# Altium PCB sha2017_rev1_0_0.PcbDoc (part 1 of 2)
Units mil, origin at the board's own origin, x right, y up, seen from the top; angles counter-clockwise.
Board outline 3740.16 x 3385.83 mil, 2 copper layers (Top, Bottom), stack 65.748 mil thick; 201 components, 109 nets, 510 pads, 486 vias.
Unrouted connection lines stored in the file: 20.
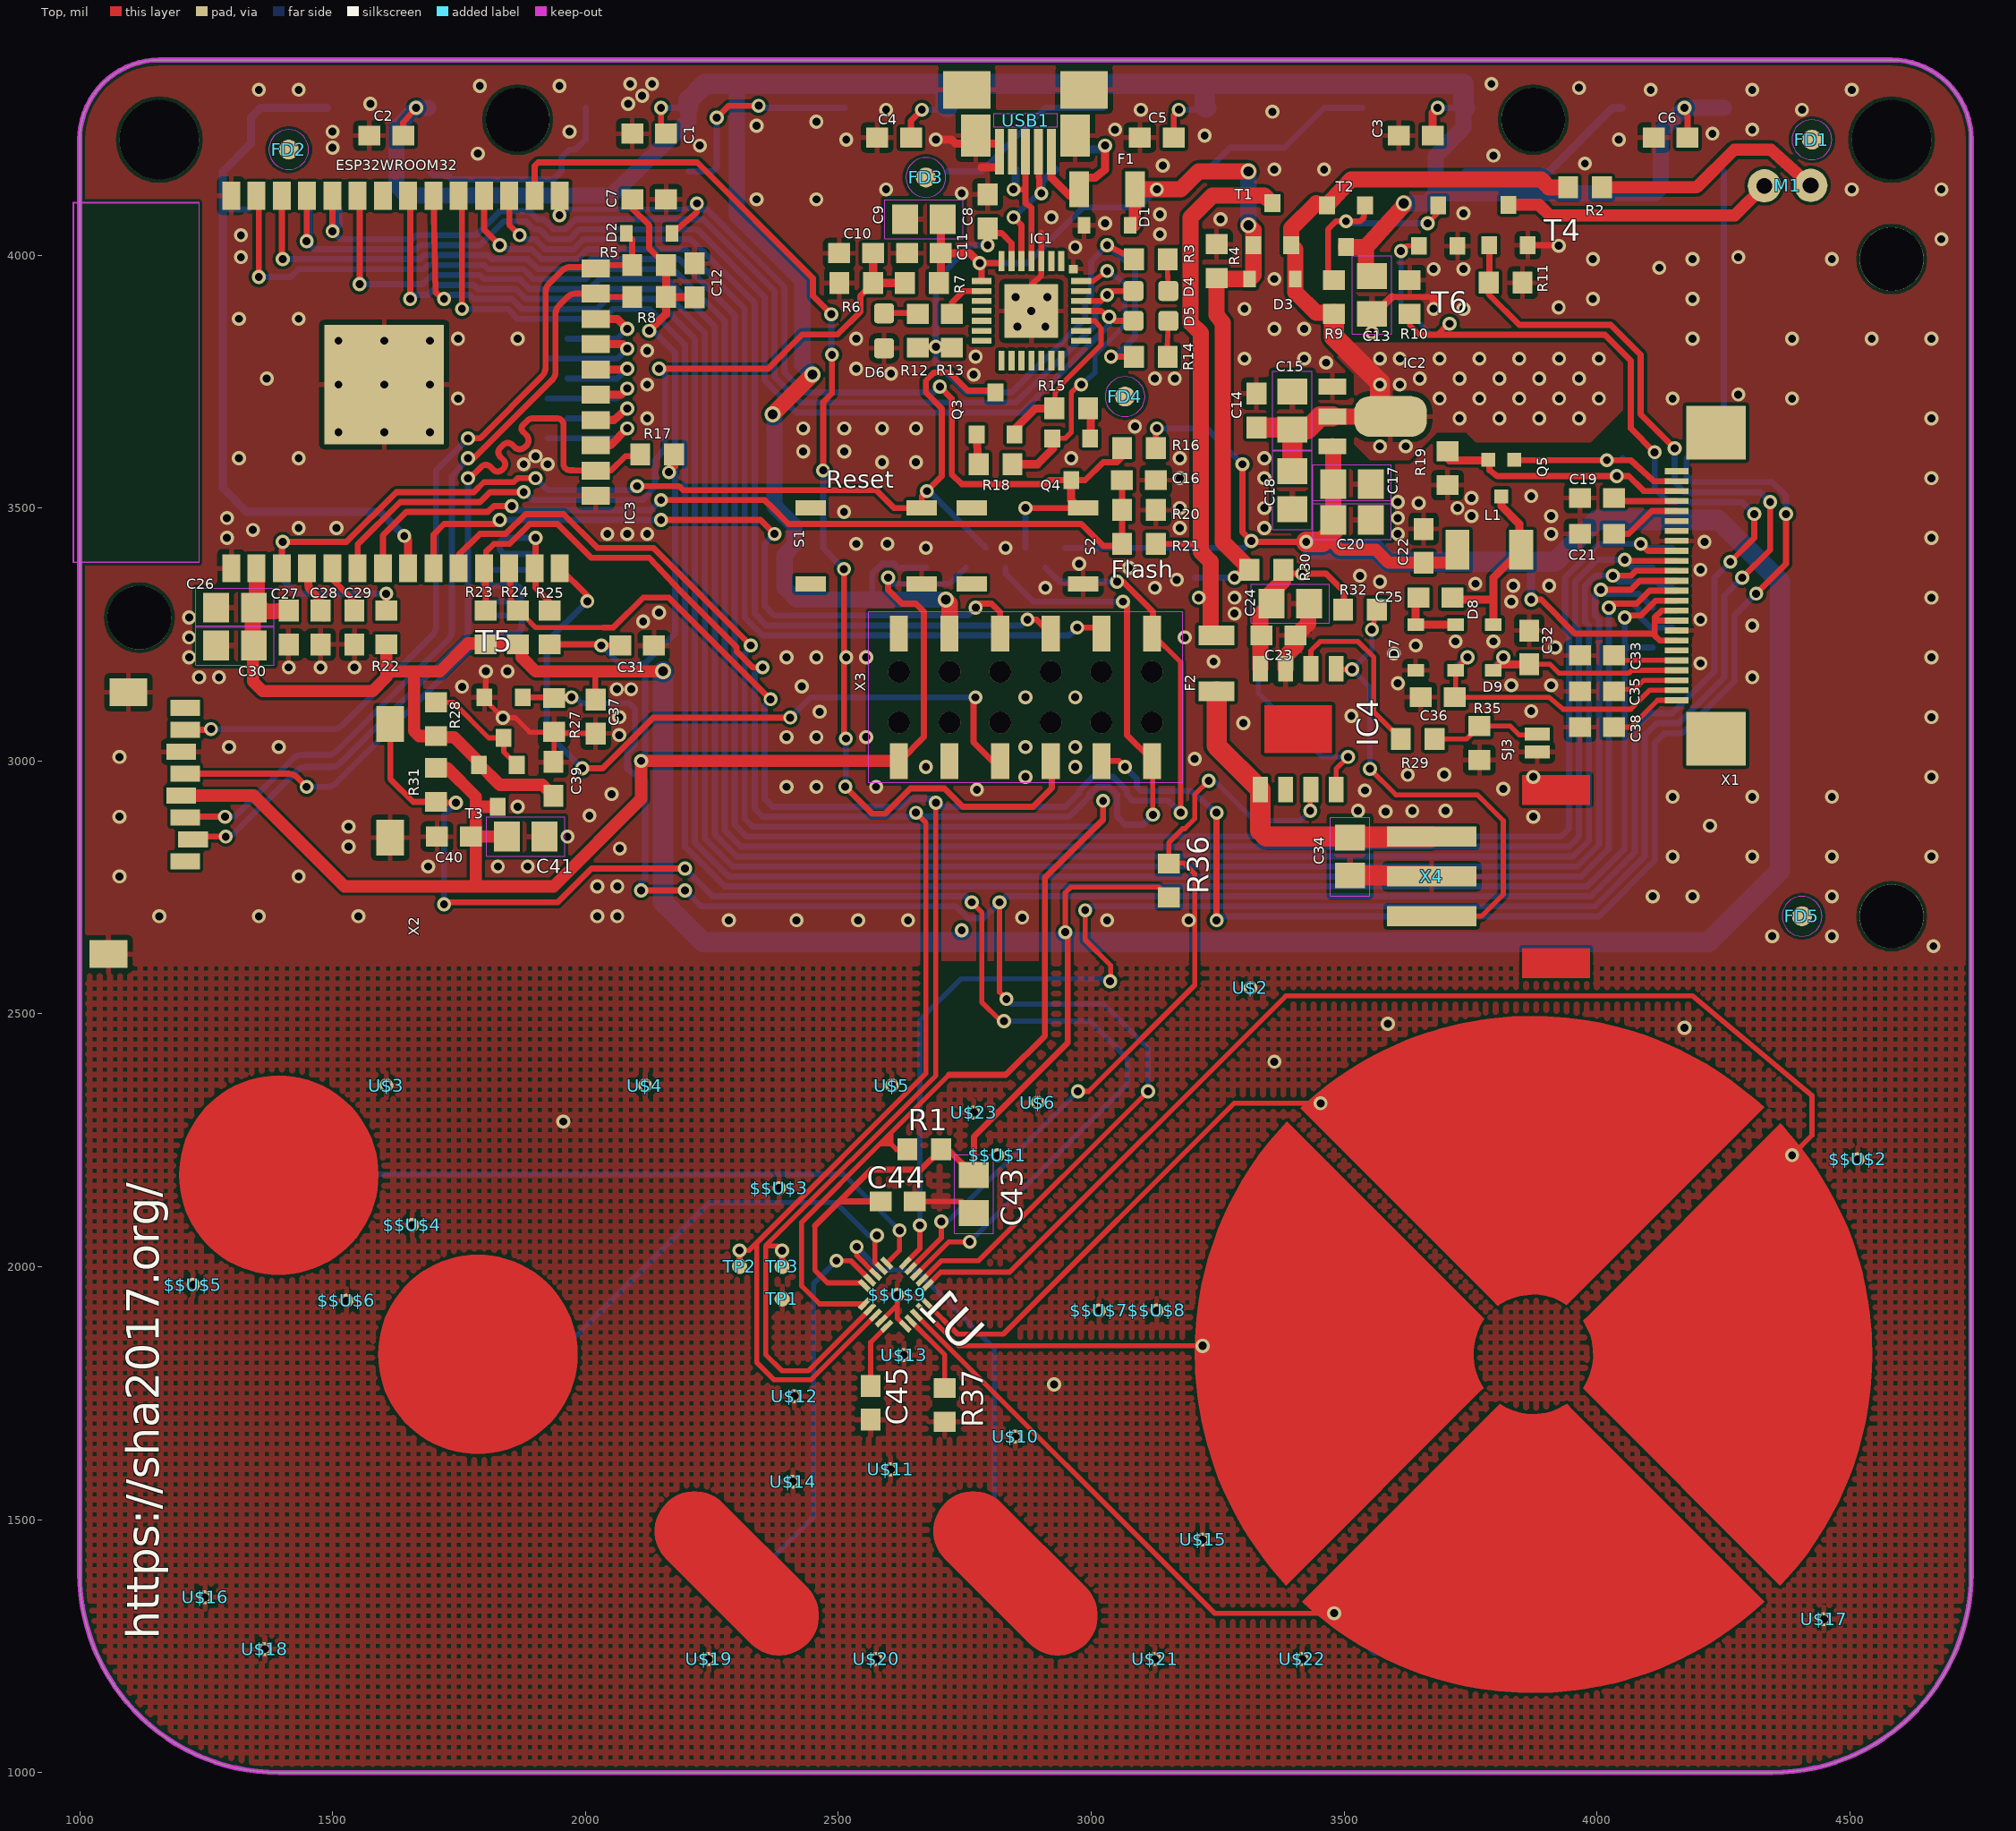
[diagram p0: Top view]
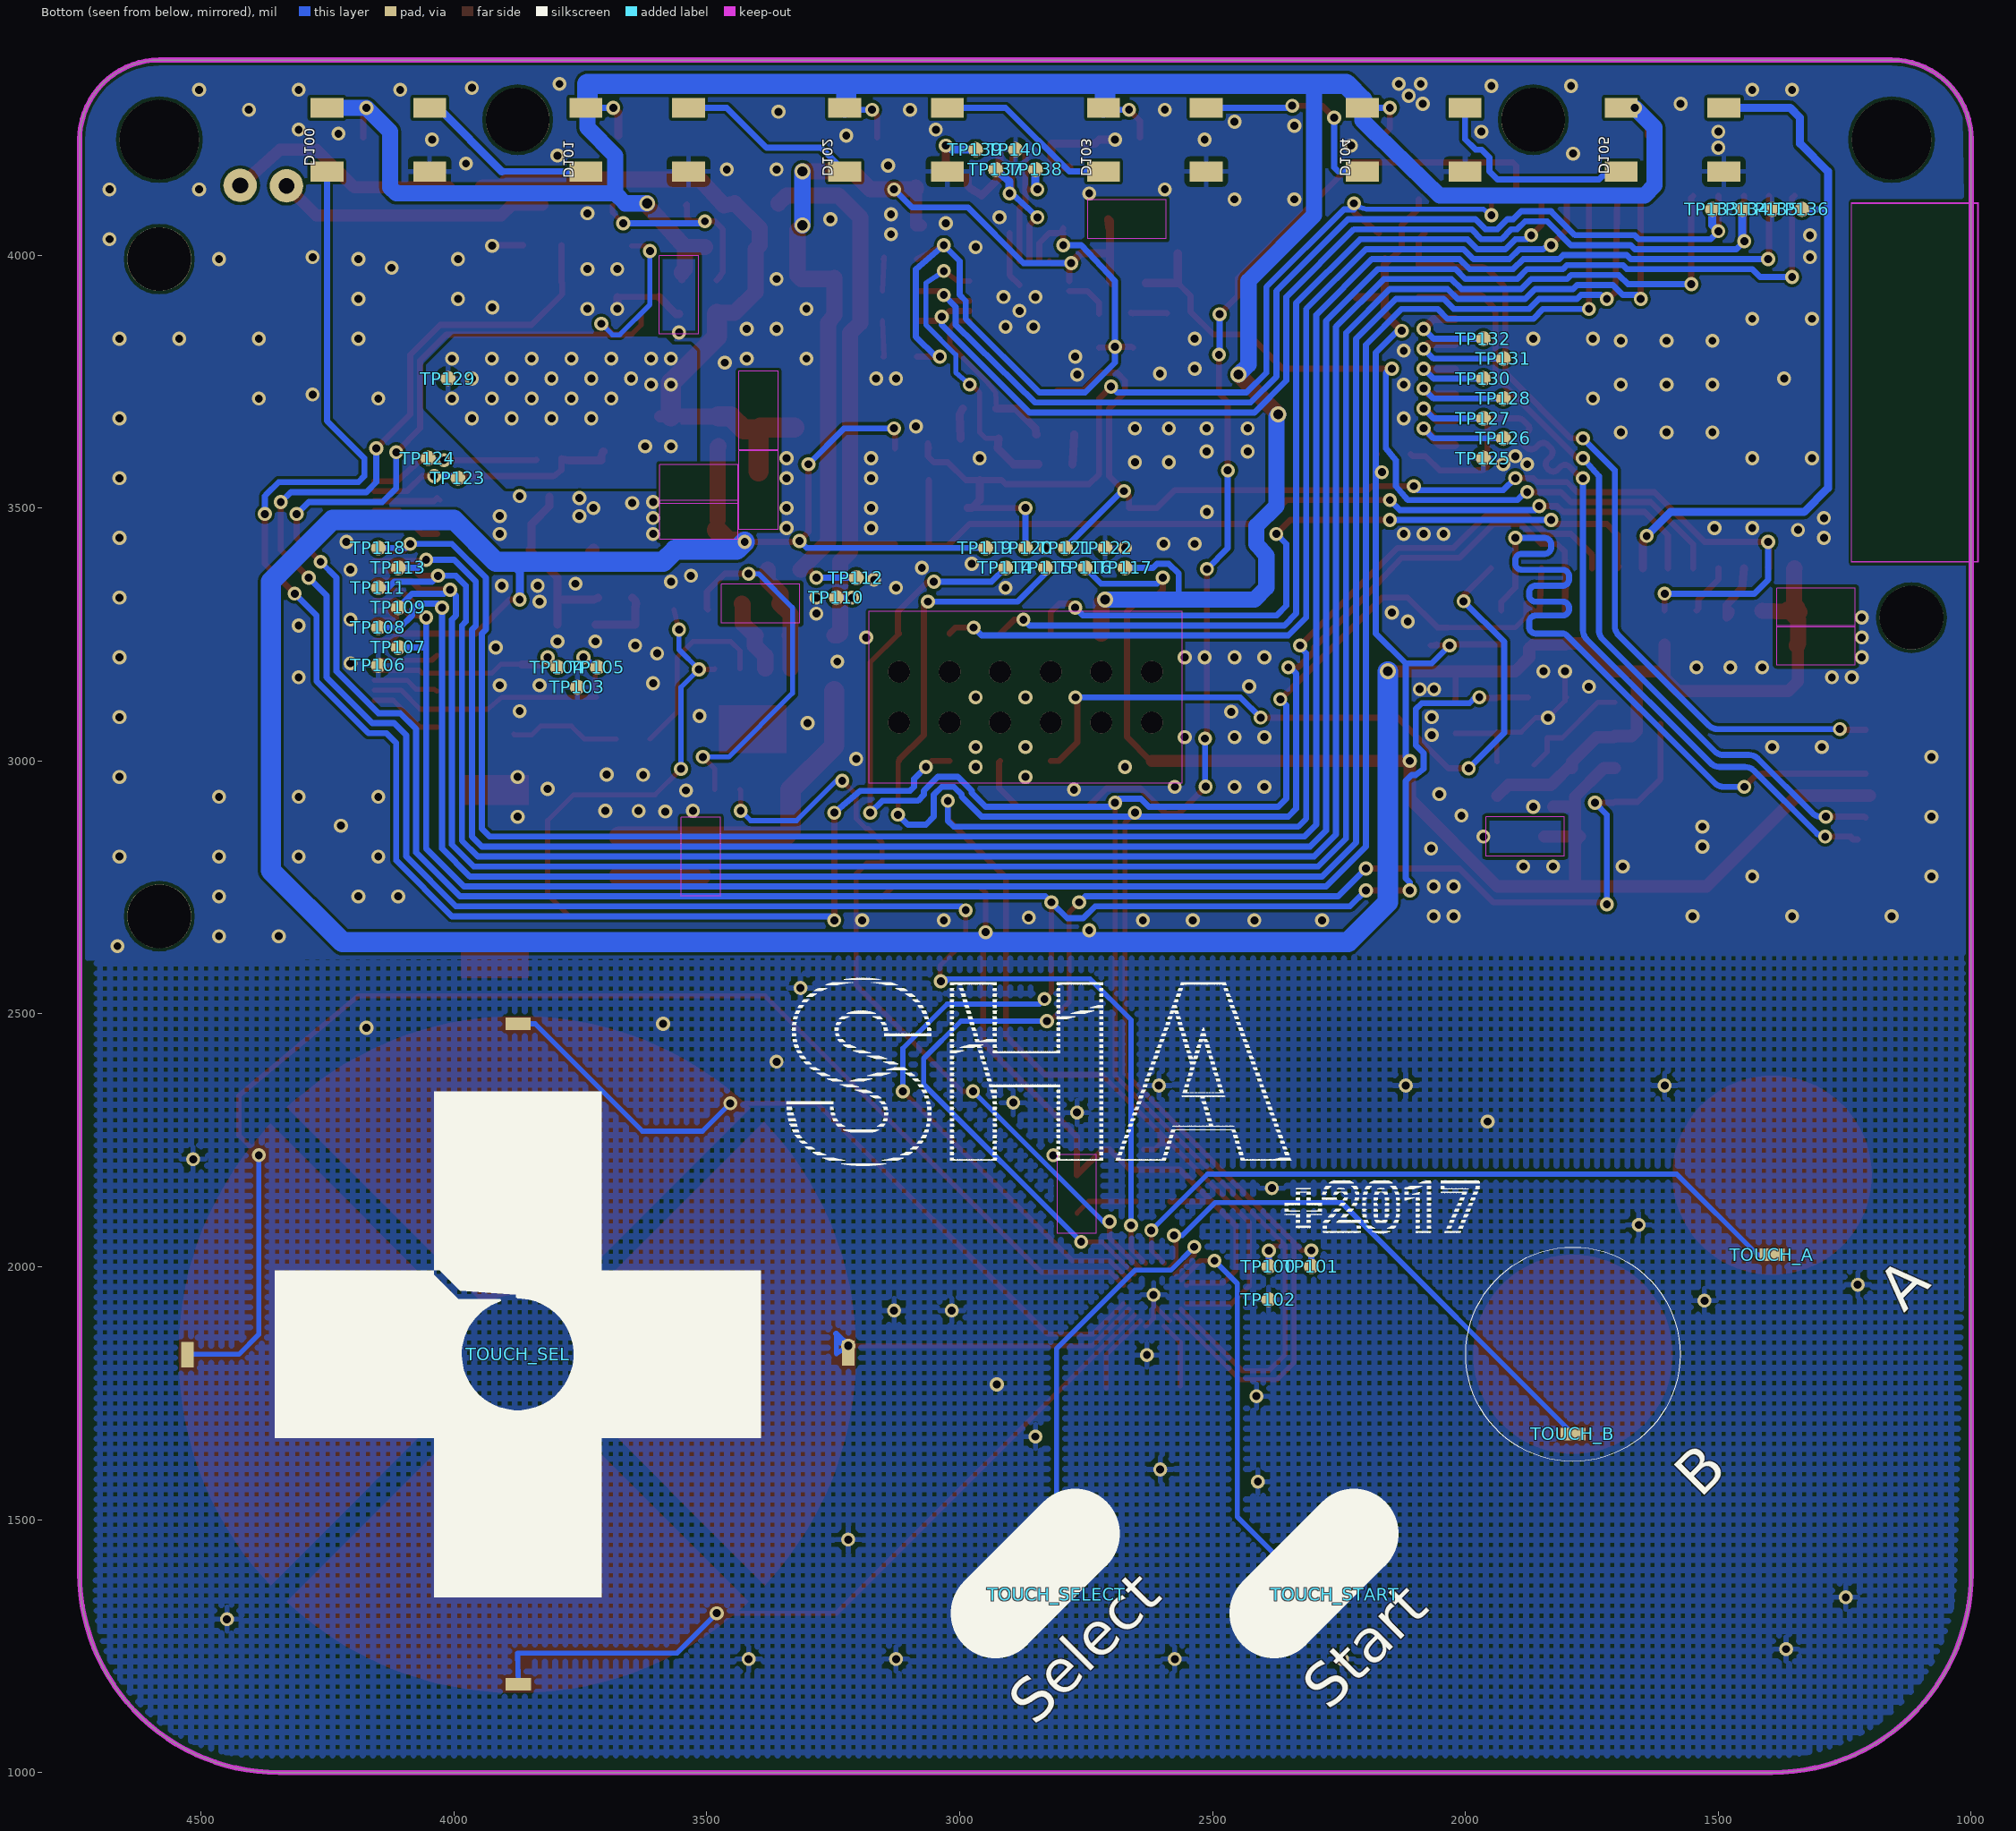
[diagram p1: Bottom view, seen from below]

## Layer stack, top to bottom
Top Solder: solder mask 0.4, Solder Resist, Dk 3.5
Top: signal copper 1.378
Dielectric 1: core 62.9921, FR-4, Dk 4.8
Bottom: signal copper 1.378
Bottom Solder: solder mask 0.4, Solder Resist, Dk 3.5

## Board outline
4582.68,4385.83 1157.48,4385.83 ccw(c1157.48,4228.35) 1000,4228.35 1000,1393.7 ccw(c1393.7,1393.7) 1393.7,1000 4346.46,1000 ccw(c4346.46,1393.7) 4740.16,1393.7 4740.16,4228.35 ccw(c4582.68,4228.35)

## Design rules (kind name [scope] priority, off if disabled: settings)
Clearance [All] p1: gap=6 ignorepadtopadclearanceinfootprint=FALSE except(8: Via-Via)
Clearance "Clearance (Same Net)" [All] p2: gap=0 ignorepadtopadclearanceinfootprint=FALSE
HoleSize HoleSize_1 [All] p1: absolutevalues=TRUE maxlimit=100000 minlimit=12 maxpercent=80.000 minpercent=20.000
HoleSize [All] p2: absolutevalues=TRUE maxlimit=100 minlimit=1 maxpercent=80.000 minpercent=20.000
HoleToHoleClearance mdViaViaSameLayer [All] p1: gap=8 allowstackedmicrovias=TRUE
HoleToHoleClearance [All] p2: gap=10 allowstackedmicrovias=TRUE
PasteMaskExpansion mlMinCreamFrame [All] p1: expansion=0
PasteMaskExpansion [All] p2: expansion=0
PolygonConnect ThermalVias [IsVia] p1: connectstyle=Direct reliefconductorwidth=10 reliefentries=4 polygonreliefangle="90 Angle" airgapwidth=10
PolygonConnect [All] p2: connectstyle=Relief reliefconductorwidth=10 reliefentries=4 polygonreliefangle="90 Angle" airgapwidth=10
RoutingVias [All] p1: holewidth=28 width=50 viastyle="Through Hole" minholewidth=28 minwidth=50 maxholewidth=28 maxwidth=50
SilkToSilkClearance [All] p1 off: silktosilkclearance=10
SilkToSolderMaskClearance [IsPad] p1 off: minsilkscreentomaskgap=10 clearancetoexposedcopper=TRUE
SolderMaskExpansion mlMinStopFrame [All] p1: expansion=0
SolderMaskExpansion [All] p2: expansion=4
Width Width_1 [All] p1: maxlimit=100000 minlimit=6 preferedwidth=10
Width [All] p2: maxlimit=10 minlimit=10 preferedwidth=10
25 further rules are at their usual default settings.

## Components (designator, comment, footprint, x,y, rotation, side; value= is the part's Value field where it differs from the comment)
$$U$1 "" VIA 2814.96,2220.47 r0 top
$$U$2 "" VIA 4515.75,2212.6 r0 top
$$U$3 "" VIA 2382.88,2155.54 r0 top
$$U$4 "" VIA 1657.48,2082.68 r0 top
$$U$5 "" VIA 1224.41,1964.57 r0 top
$$U$6 "" VIA 1527.56,1933.07 r0 top
$$U$7 "" VIA 3015.75,1913.39 r0 top
$$U$8 "" VIA 3129.92,1913.39 r0 top
$$U$9 "" VIA 2616.88,1944.45 r0 top
C1 "100n" C0603-DASHES 2125.98,4240.16 r0 top
C2 "100n" C0603-DASHES 1606.3,4236.22 r0 top
C3 "100n" C0603-DASHES 3641.73,4236.22 r0 top
C4 "100n" C0603-DASHES 2610.24,4232.28 r0 top
C5 "100n" C0603-DASHES 3129.92,4232.28 r0 top
C6 "100n" C0603-DASHES 4145.67,4232.28 r0 top
C7 "100n" C0603-DASHES 2125.98,4110.24 r0 top
C8 "100n" C0603-DASHES 2795.28,4086.61 r90 top
C9 "4u7/16V" C0805 2669.29,4070.87 r180 top
C10 "100n" C0603-DASHES 2535.43,4003.94 r180 top
C11 "100n" C0603-DASHES 2669.29,4003.94 r180 top
C12 "100n" C0603-DASHES 2215.84,3950.17 r90 top
C13 "4u7/16V" C0805 3555.12,3921.26 r270 top
C14 "100n" C0603-DASHES 3326.77,3692.91 r90 top
C15 "4u7/16V" C0805 3397.64,3692.91 r90 top
C16 "100n" C0603-DASHES 3094.49,3555.12 r0 top
C17 "4u7/16V" C0805 3515.75,3547.24 r0 top
C18 "4u7/16V" C0805 3397.64,3535.43 r270 top
C19 "1u" C0603-DASHES 4000,3519.69 r0 top
C20 "4u7/16V" C0805 3515.75,3476.38 r0 top
C21 "1u" C0603-DASHES 4000,3448.82 r0 top
C22 "100n" C0603-DASHES 3657.48,3425.2 r90 top
C23 "100n" C0603-DASHES 3370.08,3248.03 r180 top
C24 "4u7/16V" C0805 3393.7,3311.02 r0 top
C25 "1u" C0603-DASHES 3681.1,3322.83 r0 top
C26 "4u7/16V" C0805 1307.09,3303.15 r180 top
C27 "100n" C0603-DASHES 1413.39,3263.78 r270 top
C28 "100n" C0603-DASHES 1476.38,3263.78 r90 top
C29 "100n" C0603-DASHES 1543.31,3263.78 r90 top
C30 "4u7/16V" C0805 1307.09,3228.35 r180 top
C31 "100n" C0603-DASHES 2102.36,3228.35 r0 top
C32 "1u" C0603-DASHES 3866.14,3224.41 r270 top
C33 "1u" C0603-DASHES 4000,3208.66 r0 top
C34 "4u7/16V" C0805 3511.81,2811.02 r270 top
C35 "1u" C0603-DASHES 4000,3137.8 r0 top
C36 "1u" C0603-DASHES 3685.04,3125.98 r0 top
C37 "100n" C0603-DASHES 2020.25,3087.84 r270 top
C38 "1u" C0603-DASHES 4000,3066.93 r0 top
C39 "1u" C0603-DASHES 1937.01,2964.57 r90 top
C40 "100n" C0603-DASHES 1740.16,2850.39 r180 top
C41 "4u7/16V" C0805 1881.89,2850.39 r0 top
C43 "4u7/16V" C0805 2768.14,2143.59 r270 top
C44 "100n" C0603-DASHES 2617.4,2129.25 r0 top
C45 "100n" C0603-DASHES 2563.92,1730.95 r270 top
D1 "SD05-7" SOD-323 3031.5,4059.06 r180 top
D2 "NSVR0320MW2T1G" SOD-323 2125.98,4043.31 r180 top
D3 "NSVR0320MW2T1G" SOD-323 3358.27,3952.76 r180 top
D4 "Yellow" LED-0603 3118.11,3929.13 r90 top
D5 "RED" LED-0603 3118.11,3870.08 r90 top
D6 "green" LED-0603 2590.55,3850.39 r180 top
D7 "NSVR0320MW2T1G" SOD-323 3641.73,3224.41 r90 top
D8 "NSVR0320MW2T1G" SOD-323 3720.47,3224.41 r270 top
D9 "NSVR0320MW2T1G" SOD-323 3795.28,3224.41 r90 top
D100 "SK6812" WS2812B 4149.61,4228.35 r180 bottom
D101 "SK6812" WS2812B 3637.8,4228.35 r180 bottom
D102 "SK6812" WS2812B 3125.98,4228.35 r180 bottom
D103 "SK6812" WS2812B 2614.17,4228.35 r180 bottom
D104 "SK6812" WS2812B 2102.36,4228.35 r180 bottom
D105 "SK6812" WS2812B 1590.55,4228.35 r180 bottom
F1 "900mA" PTC-1206 3031.5,4129.92 r0 top
F2 "900mA" PTC-1206 3248.03,3192.91 r90 top
FD1 "" FIDUCIAL_1MM 4425.2,4228.35 r0 top
FD2 "" FIDUCIAL_1MM 1413.39,4208.66 r0 top
FD3 "" FIDUCIAL_1MM 2673.23,4153.54 r0 top
FD4 "" FIDUCIAL_1MM 3066.93,3720.47 r0 top
FD5 "" FIDUCIAL_1MM 4405.51,2692.91 r0 top
IC1 "CP210X_USB_UART" MLP28 2881.89,3889.76 r270 top
IC2 "AP7215" SOT89 3555.12,3681.1 r270 top
IC3 "ESP32WROOM32" ESP32MOD 2086.61,3354.33 r90 top
IC4 "" SOP-8 3409.45,3062.99 r270 top
L1 "22µ" 1210 3787.4,3417.32 r0 top
M1 "" VIBE-MOTOR-10MM 4169.29,3940.94 r90 top
Q3 "MMBT2222A" SOT23-3 2811.02,3685.04 r0 top
Q4 "MMBT2222A" SOT23-3 2960.63,3598.43 r180 top
Q5 "SI1304 BDL" SOT323 3811.02,3559.06 r180 top
R1 "100k" R0603-DASHES 2670,2231.87 r0 top
R2 "27R" R0603-DASHES 3976.38,4133.86 r180 top
R3 "1k" R0603-DASHES 3118.11,3992.13 r180 top
R4 "10k" R0603-DASHES 3248.03,3988.19 r270 top
R5 "10k" R0603-DASHES 2125.98,3980.31 r0 top
R6 "100k" R0603-DASHES 2535.43,3944.88 r0 top
R7 "220k" R0603-DASHES 2665.35,3944.88 r0 top
R8 "10k" R0603-DASHES 2125.98,3917.32 r0 top
R9 "10k" R0603-DASHES 3480.32,3917.32 r270 top
R10 "10k" R0603-DASHES 3629.92,3917.32 r90 top
R11 "100k" R0603-DASHES 3819.55,3945.33 r0 top
R12 "1k" R0603-DASHES 2657.48,3850.39 r270 top
R13 "10k" R0603-DASHES 2724.41,3850.39 r90 top
R14 "1k" R0603-DASHES 3118.11,3799.21 r180 top
R15 "10k" R0603-DASHES 2960.63,3696.85 r0 top
R16 "10k" R0603-DASHES 3094.49,3618.11 r0 top
R17 "10k" R0603-DASHES 2141.73,3606.3 r0 top
R18 "10k" R0603-DASHES 2811.02,3586.61 r180 top
R19 "5R" R0603-DASHES 3704.72,3578.74 r270 top
R20 "100k" R0603-DASHES 3094.49,3496.06 r180 top
R21 "220k" R0603-DASHES 3094.49,3429.13 r0 top
R22 "10k" R0603-DASHES 1606.3,3263.78 r90 top
R23 "4k7" R0603-DASHES 1803.15,3263.78 r90 top
R24 "4k7" R0603-DASHES 1866.14,3263.78 r90 top
R25 "10k" R0603-DASHES 1929.13,3263.78 r270 top
R27 "100k" R0603-DASHES 1937.99,3090.88 r90 top
R28 "10k" R0603-DASHES 1704.72,3082.68 r270 top
R29 "1.2k" R0603-DASHES 3645.67,3043.31 r0 top
R30 "150k" R0603-DASHES 3346.46,3377.95 r0 top
R31 "100k" R0603-DASHES 1704.72,2952.76 r270 top
R32 "10k" R0603-DASHES 3531.5,3299.21 r180 top
R35 "1.2k" R0603-DASHES 3767.72,3035.43 r270 top
R36 "100k" R0603-DASHES 3153.54,2763.78 r270 top
R37 "75k 1%" R0603-DASHES 2710.58,1726.93 r90 top
S1 "SWITCH-MOMENTARY-2SMD" TACTILE-SWITCH-SMD 2555.12,3425.2 r180 top
S2 "SWITCH-MOMENTARY-2SMD" TACTILE-SWITCH-SMD 2874.02,3425.2 r180 top
SJ3 "JUMPER-PAD-2-NOYES_SILK" PAD-JUMPER-2-NO_YES_SILK 3881.89,3035.43 r90 top
T1 "" SOT23-3 3358.27,4059.06 r0 top
T2 "" SOT23-3 3503.94,4059.06 r180 top
T3 "" SOT23-3 1826.77,2952.76 r180 top
T4 "AO3400" SOT-23 3826.25,4059.37 r180 top
T5 "AO3400" SOT-23 1837.5,3085.62 r0 top
T6 "AO3400" SOT-23 3687.5,4058.12 r180 top
TOUCH_A "" TOUCH_BUTTON 1393.7,2181.1 r180 bottom
TOUCH_B "" TOUCH_BUTTON 1787.4,1826.77 r180 bottom
TOUCH_SEL "" TOUCH_CROSS 3874.02,1826.77 r180 bottom
TOUCH_SELECT "" TOUCH_SELECT 2850.39,1393.7 r135 bottom
TOUCH_START "" TOUCH_SELECT 2299.21,1393.7 r135 bottom
TP1 "" PAD.03X.03 2389.09,1936.43 r0 top
TP2 "" PAD.03X.03 2304.88,2000.76 r180 top
TP3 "" PAD.03X.03 2388.86,2000.48 r0 top
TP100 "" PAD.03X.03 2388.86,2000.48 r180 bottom
TP101 "" PAD.03X.03 2304.88,2000.76 r0 bottom
TP102 "" PAD.03X.03 2389.49,1934.85 r180 bottom
TP103 "" PAD.03X.03 3755.91,3145.67 r180 bottom
TP104 "" PAD.03X.03 3795.28,3185.04 r180 bottom
TP105 "" PAD.03X.03 3716.54,3185.04 r180 bottom
TP106 "" PAD.03X.03 4149.61,3188.98 r180 bottom
TP107 "" PAD.03X.03 4110.24,3224.41 r180 bottom
TP108 "" PAD.03X.03 4149.61,3263.78 r180 bottom
TP109 "" PAD.03X.03 4110.24,3303.15 r180 bottom
TP110 "" PAD.03X.03 3244.09,3322.83 r180 bottom
TP111 "" PAD.03X.03 4149.61,3342.52 r180 bottom
TP112 "" PAD.03X.03 3204.72,3362.2 r180 bottom
TP113 "" PAD.03X.03 4110.24,3381.89 r180 bottom
TP114 "" PAD.03X.03 2909.45,3381.89 r180 bottom
TP115 "" PAD.03X.03 2830.71,3381.89 r180 bottom
TP116 "" PAD.03X.03 2751.97,3381.89 r180 bottom
TP117 "" PAD.03X.03 2673.23,3381.89 r180 bottom
TP118 "" PAD.03X.03 4149.61,3421.26 r180 bottom
TP119 "" PAD.03X.03 2948.82,3421.26 r180 bottom
TP120 "" PAD.03X.03 2870.08,3421.26 r180 bottom
TP121 "" PAD.03X.03 2791.34,3421.26 r180 bottom
TP122 "" PAD.03X.03 2712.6,3421.26 r180 bottom
TP123 "" PAD.03X.03 3992.13,3559.06 r180 bottom
TP124 "" PAD.03X.03 4051.18,3598.43 r180 bottom
TP125 "" PAD.03X.03 1964.57,3598.43 r180 bottom
TP126 "" PAD.03X.03 1925.2,3637.8 r180 bottom
TP127 "" PAD.03X.03 1964.57,3677.17 r180 bottom
TP128 "" PAD.03X.03 1925.2,3716.54 r180 bottom
TP129 "" PAD.03X.03 4011.81,3755.91 r180 bottom
TP130 "" PAD.03X.03 1964.57,3755.91 r180 bottom
TP131 "" PAD.03X.03 1925.2,3795.28 r180 bottom
TP132 "" PAD.03X.03 1964.57,3834.65 r180 bottom
TP133 "" PAD.03X.03 1511.81,4090.55 r180 bottom
TP134 "" PAD.03X.03 1452.76,4090.55 r180 bottom
TP135 "" PAD.03X.03 1393.7,4090.55 r180 bottom
TP136 "" PAD.03X.03 1334.65,4090.55 r180 bottom
TP137 "" PAD.03X.03 2929.13,4169.29 r180 bottom
TP138 "" PAD.03X.03 2850.39,4169.29 r180 bottom
TP139 "" PAD.03X.03 2968.5,4208.66 r180 bottom
TP140 "" PAD.03X.03 2889.76,4208.66 r180 bottom
U1 "MPR121QR2" QFN40P300X300X60-20N 2614.17,1944.88 r45 top
U$2 "" VIA 3314.96,2551.18 r0 top
U$3 "" VIA 1606.3,2358.27 r0 top
U$4 "" VIA 2118.11,2358.27 r0 top
U$5 "" VIA 2606.3,2358.27 r0 top
U$6 "" VIA 2894.19,2324.52 r0 top
U$10 "" VIA 2850.39,1664.28 r0 top
U$11 "" VIA 2603.67,1599.28 r0 top
U$12 "" VIA 2413.39,1744.09 r0 top
U$13 "" VIA 2629.99,1825.55 r0 top
U$14 "" VIA 2410.5,1575.12 r0 top
U$15 "" VIA 3220.47,1460.63 r0 top
U$16 "" VIA 1248.03,1346.46 r0 top
U$17 "" VIA 4448.82,1303.15 r0 top
U$18 "" VIA 1366.14,1244.09 r0 top
U$19 "" VIA 2244.09,1224.41 r0 top
U$20 "" VIA 2574.8,1224.41 r0 top
U$21 "" VIA 3125.98,1224.41 r0 top
U$22 "" VIA 3417.32,1224.41 r0 top
U$23 "" VIA 2768.1,2304.9 r0 top
USB1 "" MOLEX-47364-0001 2870.08,4326.77 r270 top
X1 "" 68712414022 4181.1,3346.46 r90 top
X2 "2908-05WB-MG" MICRO-SD-SOCKET-PP 1629.92,3153.54 r90 top
X3 "" 610X12243021 2870.08,3125.98 r0 top
X4 "" JST-PH3 3673.23,2771.65 r270 top

## Footprints (in the part's own frame and the unit in brackets; to place one, negate y for a bottom-side part, rotate by r counter-clockwise, add the part's x,y. Pads: shape width x height; smd on the part's side, far side on the other; paste and mask are expansions set on the pad)
610X12243021 [mil] "610X12243021"
  round 43.31 hole 43.31: 1(-250,-50) 1(-250,50) 1(-150,-50) 1(-150,50) 1(-50,-50) 1(-50,50) 1(50,-50) 1(50,50) 1(150,-50) 1(150,50) 1(250,-50) 1(250,50)
  rect 35.43x70.87 smd: 1(-250,125.98) 2(-150,125.98) 3(-50,125.98) 4(50,125.98) 5(150,125.98) 6(250,125.98) 7(250,-125.98) 8(150,-125.98) 9(50,-125.98) 10(-50,-125.98) 11(-150,-125.98) 12(-250,-125.98)
  Keep-Out Layer region: -309.84,169.29 309.84,169.29 309.84,-169.29 -309.84,-169.29
1210 [mm] "1210"
  rect 1.2x2 smd: 1(-1.6,0) 2(1.6,0)
68712414022 [mm] "68712414022"
  rect 0.3x1.2 smd: 1(-5.75,0.6) 2(-5.25,0.6) 3(-4.75,0.6) 4(-4.25,0.6) 5(-3.75,0.6) 6(-3.25,0.6) 7(-2.75,0.6) 8(-2.25,0.6) 9(-1.75,0.6) 10(-1.25,0.6) 11(-0.75,0.6) 12(-0.25,0.6) 13(0.25,0.6) 14(0.75,0.6) 15(1.25,0.6) 16(1.75,0.6) 17(2.25,0.6) 18(2.75,0.6) 19(3.25,0.6) 20(3.75,0.6) 21(4.25,0.6) 22(4.75,0.6) 23(5.25,0.6) 24(5.75,0.6)
  rect 2.7x3 smd: 25(-7.68,-1.38) 26(7.68,-1.38)
C0603-DASHES [mm] "C0603-DASHES"
  rect 1.1x1 smd: 1(-0.85,0) 2(0.85,0)
C0805 [mil] "C0805"
  rect 51.18x59.06 smd: 1(-37.4,0) 2(37.4,0)
  Keep-Out Layer lines w2: 77.68,38.7 -77.68,38.7 -77.68,-38.7 77.68,-38.7 77.68,38.7
ESP32MOD [mm] "ESP32MOD"
  rect 6x6 smd: 0(9.9,12.3)
  rect 1.4x0.9 smd: 1(0.68,19.99) 2(0.68,18.72) 3(0.68,17.45) 4(0.68,16.18) 5(0.68,14.91) 6(0.68,13.64) 7(0.68,12.37) 8(0.68,11.1) 9(0.68,9.83) 10(0.68,8.56) 11(0.68,7.29) 12(0.68,6.02) 13(0.68,4.75) 14(0.68,3.48) 25(19.38,3.48) 26(19.38,4.75) 27(19.38,6.02) 28(19.38,7.29) 29(19.38,8.56) 30(19.38,9.83) 31(19.38,11.1) 32(19.38,12.37) 33(19.38,13.64) 34(19.38,14.91) 35(19.38,16.18) 36(19.38,17.45) 37(19.38,18.72) 38(19.38,19.99)
  rect 0.9x1.4 smd: 15(4.31,1.68) 16(5.58,1.68) 17(6.85,1.68) 18(8.12,1.68) 19(9.39,1.68) 20(10.66,1.68) 21(11.93,1.68) 22(13.2,1.68) 23(14.47,1.68) 24(15.74,1.68)
  Keep-Out Layer region: 0.97,27.94 0.97,21.59 19.05,21.59 19.05,27.94
  Keep-Out Layer region: 1,27.9 1,21.6 19,21.6 19,27.9
FIDUCIAL_1MM [mm] "FIDUCIAL_1MM"
  rrect100% 1x1 smd paste-0.5 mask-0.5: 1(0,0)
  Top keep-out region: -1,0 -0.924,-0.383 -0.707,-0.707 -0.383,-0.924 0,-1 0,-1 0.383,-0.924 0.707,-0.707 0.924,-0.383 1,0 1,0 0.924,0.383 0.707,0.707 0.383,0.924 0,1 0,1 -0.383,0.924 -0.707,0.707 -0.924,0.383 -1,0
JST-PH3 [mm] "JST-PH3"
  rect 1x4.5 smd: 1(2,0) 2(0,0) 3(-2,0)
  Top region: -5.1,4.55 -3.6,4.55 -3.6,7.95 -5.1,7.95
  Top region: 3.6,4.55 5.1,4.55 5.1,7.95 3.6,7.95
LED-0603 [mm] "LED-0603"
  rrect30% 1x1 smd: A(0,-0.877) C(0,0.877)
MICRO-SD-SOCKET-PP [mil] "MICRO-SD-SOCKET-PP"
  rect 31.5x59.06 smd: 1(-351.97,421.26) 2(-308.66,405.51) 3(-265.35,421.26) 4(-222.05,429.13) 5(-178.74,421.26) 6(-135.43,429.13) 7(-92.13,421.26) 8(-48.82,421.26)
  rect 70.87x55.12 smd: CD1(-80.71,15.75) CD2(-305.12,15.75)
  rect 55.12x74.8 smd: GND1(-535.43,572.83) GND3(-17.72,533.46)
MLP28 [mm] "MLP28"
  rect 1x0.3 smd paste-0.5 mask-0.5: 1(-2.5,1.5) 2(-2.5,1) 3(-2.5,0.5) 4(-2.5,0) 5(-2.5,-0.5) 6(-2.5,-1) 7(-2.5,-1.5) 15(2.5,-1.5) 16(2.5,-1) 17(2.5,-0.5) 18(2.5,0) 19(2.5,0.5) 20(2.5,1) 21(2.5,1.5)
  rect 0.3x1 smd paste-0.5 mask-0.5: 8(-1.5,-2.5) 9(-1,-2.5) 10(-0.5,-2.5) 11(0,-2.5) 12(0.5,-2.5) 13(1,-2.5) 14(1.5,-2.5) 22(1.5,2.5) 23(1,2.5) 24(0.5,2.5) 25(0,2.5) 26(-0.5,2.5) 27(-1,2.5) 28(-1.5,2.5)
  rect 2.7x2.7 smd paste-1.35 mask-1.35: EXP(0,0)
  rect 0.435x0.435 smd paste-0.218 mask-0.218: M(-2.103,2.103)
MOLEX-47364-0001 [mil] "MOLEX-47364-0001"
  rect 90.55x17.72 smd: 1(122.05,51.18) 2(122.05,25.59) 3(122.05,0) 4(122.05,-25.59) 5(122.05,-51.18)
  rect 74.8x93.5 smd: GND1(0,116.14) GND4(0,-116.14)
  rect 82.68x58.07 smd: GND2(90.55,98.43) GND3(90.55,-98.43)
  Top keep-out region: 47.24,-62.99 72.83,-62.99 72.83,62.99 47.24,62.99
PAD-JUMPER-2-NO_YES_SILK [mil] "PAD-JUMPER-2-NO_YES_SILK"
  rect 25x50 smd paste-25: 1(-17.72,0) 2(17.72,0)
PAD.03X.03 [mil] "PAD.03X.03"
  rrect100% 30x30 smd paste-15: P$1(0,0)
PTC-1206 [mm] "PTC-1206"
  rect 1x1.8 smd: 1(-1.4,0) 2(1.4,0)
QFN40P300X300X60-20N [mil] "QFN40P300X300X60-20N"
  rect 28x10 smd: 1(-57,31) 2(-57,16) 3(-57,0) 4(-57,-16) 5(-57,-31) 11(57,-31) 12(57,-16) 13(57,0) 14(57,16) 15(57,31)
  rect 10x28 smd: 6(-31,-57) 7(-16,-57) 8(0,-57) 9(16,-57) 10(31,-57) 16(31,57) 17(16,57) 18(0,57) 19(-16,57) 20(-31,57)
R0603-DASHES [mm] "R0603-DASHES"
  rect 1x1.1 smd: 1(-0.85,0) 2(0.85,0)
SOD-323 [mil] "SOD-323"
  rect 24.8x32.68 smd: A(45.28,0) C(-45.28,0)
SOP-8 [mil] "SOP-8"
  rect 50x29.92 smd: 1(-119.49,75) 2(-119.49,25) 3(-119.49,-25) 4(-119.49,-75) 5(119.49,-75) 6(119.49,-25) 7(119.49,25) 8(119.49,75)
  Top region: -47.24,-66.93 47.24,-66.93 47.24,66.93 -47.24,66.93
SOT23-3 [mil] "SOT23-3"
  rect 31.5x35.43 smd: 1(-37.4,-39.37) 2(37.4,-39.37) 3(0,43.31)
SOT89 [mil] "SOT89"
  rect 31.5x55.12 smd: 1(-59.02,-77.99) 3(59.02,-77.99)
  rect 32x55 smd: 2(0,-78)
  rrect75% 80x143.7 smd: 2@(0,37.01)
  Top region: -16,-67 16,-67 16,-3 -16,-3
SOT323 [mm] "SOT323"
  rect 0.7x0.7 smd: 1(-0.65,-0.925) 2(0.65,-0.925) 3(0,0.925)
SOT-23 [mil] "SOT-23"
  rect 31x35 smd: 1(1,-40) 2(-37,40) 3(39,40)
TACTILE-SWITCH-SMD [mil] "TACTILE-SWITCH-SMD"
  rect 60x30 smd: 1(-110,75) 2(110,75) 3(-110,-75) 4(110,-75)
TOUCH_BUTTON [mm] "TOUCH_BUTTON"
  rect 1.27x0.635 smd paste-0.635 mask-0.635: P$1(0,-4)
  Bottom region: -5,0 -4.619,1.913 -3.536,3.536 -1.913,4.619 0,5 0,5 1.913,4.619 3.536,3.536 4.619,1.913 5,0 5,0 4.619,-1.913 3.536,-3.536 1.913,-4.619 0,-5 0,-5 -1.913,-4.619 -3.536,-3.536 -4.619,-1.913 -5,0
TOUCH_CROSS [mm] "TOUCH_CROSS"
  rect 1.27x0.635 smd paste-0.635 mask-0.635: D(0.03,-16.57) UP(0.02,16.6)
  rect 0.635x1.27 smd paste-0.635 mask-0.635: L(-16.59,-0.02) R(16.6,0.06)
  Bottom region: -1.76,-2.55 -1.92,-2.73 -11.61,-12.42 -11.5,-12.52 -11.174,-12.809 -10.84,-13.09 -10.84,-13.09 -10.079,-13.684 -9.29,-14.24 -9.29,-14.24 -8.631,-14.654 -7.95,-15.03 -7.95,-15.03 -7.152,-15.421 -6.34,-15.78 -6.34,-15.78 -5.805,-15.988 -5.26,-16.17 -5.26,-16.17 -4.935,-16.27 -4.61,-16.37 -4.61,-16.37 -4.148,-16.498 -3.68,-16.6 -3.68,-16.6 -3.384,-16.658 -3.09,-16.72 -3.09,-16.72 -2.612,-16.81 -2.13,-16.87 -2.13,-16.87 -1.685,-16.913 -1.24,-16.96 -1.24,-16.96 -1.01,-16.977 -0.78,-16.98 -0.78,-16.98 0.03,-17 0.77,-16.99 1.73,-16.92 2.63,-16.8 3.43,-16.66 4.07,-16.51 4.85,-16.3 5.63,-16.05 6.22,-15.83 6.74,-15.61 7.4,-15.31 8.15,-14.92 8.72,-14.6 9.41,-14.16 9.99,-13.76 10.64,-13.26 11.25,-12.75 11.61,-12.42 1.68,-2.49 1.39,-2.66 1.06,-2.81 0.62,-2.94 0.17,-3 -0.25,-2.99 -0.64,-2.93 -0.92,-2.86 -1.23,-2.74 -1.61,-2.54 -1.69,-2.48
  Bottom region: 2.54,-1.75 2.72,-1.91 12.41,-11.6 12.56,-11.44 12.849,-11.114 13.13,-10.78 13.13,-10.78 13.714,-10.014 14.26,-9.22 14.26,-9.22 14.674,-8.561 15.05,-7.88 15.05,-7.88 15.441,-7.082 15.8,-6.27 15.8,-6.27 15.993,-5.734 16.16,-5.19 16.16,-5.19 16.26,-4.865 16.36,-4.54 16.36,-4.54 16.488,-4.078 16.59,-3.61 16.59,-3.61 16.648,-3.315 16.71,-3.02 16.71,-3.02 16.8,-2.542 16.86,-2.06 16.86,-2.06 16.903,-1.615 16.95,-1.17 16.95,-1.17 16.967,-0.94 16.97,-0.71 16.97,-0.71 16.99,0.1 16.98,0.84 16.91,1.8 16.79,2.7 16.65,3.5 16.5,4.14 16.29,4.92 16.04,5.7 15.82,6.29 15.6,6.81 15.3,7.47 14.91,8.22 14.59,8.79 14.15,9.48 13.75,10.06 13.25,10.71 12.72,11.28 12.36,11.69 2.45,1.78 2.65,1.46 2.8,1.13 2.93,0.69 2.99,0.24 3,-0.17 2.95,-0.57 2.88,-0.85 2.77,-1.16 2.57,-1.56 2.49,-1.69
  Bottom region: -2.57,1.76 -2.75,1.92 -12.42,11.61 -12.52,11.48 -12.809,11.154 -13.09,10.82 -13.09,10.82 -13.679,10.064 -14.23,9.28 -14.23,9.28 -14.644,8.621 -15.02,7.94 -15.02,7.94 -15.426,7.148 -15.8,6.34 -15.8,6.34 -16.008,5.805 -16.19,5.26 -16.19,5.26 -16.29,4.935 -16.39,4.61 -16.39,4.61 -16.518,4.148 -16.62,3.68 -16.62,3.68 -16.678,3.384 -16.74,3.09 -16.74,3.09 -16.83,2.612 -16.89,2.13 -16.89,2.13 -16.933,1.685 -16.98,1.24 -16.98,1.24 -16.997,1.01 -17,0.78 -17,0.78 -17.02,-0.03 -17.01,-0.77 -16.94,-1.73 -16.82,-2.63 -16.68,-3.43 -16.53,-4.07 -16.32,-4.85 -16.07,-5.63 -15.85,-6.22 -15.63,-6.74 -15.33,-7.4 -14.94,-8.15 -14.62,-8.72 -14.18,-9.41 -13.78,-9.99 -13.28,-10.64 -12.75,-11.23 -12.4,-11.61 -2.5,-1.69 -2.68,-1.39 -2.83,-1.06 -2.96,-0.62 -3.02,-0.17 -3.01,0.25 -2.95,0.64 -2.88,0.92 -2.76,1.23 -2.56,1.61 -2.5,1.69
  Bottom region: 1.85,2.51 2.01,2.68 11.7,12.37 11.55,12.51 11.224,12.799 10.89,13.08 10.89,13.08 10.129,13.674 9.34,14.23 9.34,14.23 8.681,14.644 8,15.02 8,15.02 7.202,15.411 6.39,15.77 6.39,15.77 5.855,15.978 5.31,16.16 5.31,16.16 4.985,16.26 4.66,16.36 4.66,16.36 4.198,16.488 3.73,16.59 3.73,16.59 3.434,16.648 3.14,16.71 3.14,16.71 2.662,16.8 2.18,16.86 2.18,16.86 1.735,16.903 1.29,16.95 1.29,16.95 1.06,16.967 0.83,16.97 0.83,16.97 0.02,16.99 -0.72,16.98 -1.68,16.91 -2.58,16.79 -3.38,16.65 -4.02,16.5 -4.8,16.29 -5.58,16.04 -6.17,15.82 -6.69,15.6 -7.35,15.3 -8.1,14.91 -8.67,14.61 -9.36,14.17 -9.94,13.75 -10.59,13.25 -11.19,12.79 -11.61,12.42 -1.68,2.49 -1.35,2.69 -1.02,2.84 -0.57,2.95 -0.12,3.01 0.3,2.98 0.69,2.92 0.97,2.85 1.28,2.73 1.66,2.53 1.77,2.43
TOUCH_SELECT [mil] "TOUCH_SELECT"
  rect 50x25 smd paste-25 mask-25: P$1(0,-59.06)
  Bottom region: -196.85,0 -190.86,30.13 -173.79,55.68 -148.24,72.75 -118.11,78.74 -118.11,78.74 118.11,78.74 148.24,72.75 173.79,55.68 190.86,30.13 196.85,0 196.85,0 190.86,-30.13 173.79,-55.68 148.24,-72.75 118.11,-78.74 118.11,-78.74 -118.11,-78.74 -148.24,-72.75 -173.79,-55.68 -190.86,-30.13 -196.85,0
VIA [mil] "VIA"
  round 27.75 hole 15.75: P$1(0,0)
VIBE-MOTOR-10MM [mil] "VIBE-MOTOR-10MM"
  round 66 hole 31.5: +(196.85,-253.54) -(196.06,-161.81)
WS2812B [mil] "WS2812B"
  rect 65x39.37 smd: 1(-101.46,62.99) 2(-101.46,-62.99) 3(101.46,-62.99) 4(101.46,62.99)

## Part data
$$U$1 $$U$2 $$U$3 $$U$4 $$U$5 $$U$6 $$U$7 $$U$8 $$U$9 U$2 U$3 U$4 U$5 U$6 U$10 U$11 U$12 U$13 U$14 U$15 U$16 U$17 U$18 U$19 U$20 U$21 U$22 U$23: library part VIA
C1 C2 C3 C4 C5 C6 C7 C8 C10 C11 C12 C14 C16 C19 C21 C22 C23 C25 C27 C28 C29 C31 C32 C33 C35 C36 C37 C38 C39 C40 C44 C45: library part C0603-DASHES
C9 C13 C15 C17 C18 C20 C24 C26 C30 C34 C41 C43: library part C0805
D1 D2 D3 D7 D8 D9: library part SOD-323
D4 D5 D6: library part LED-0603
D100 D101 D102 D103 D104 D105: library part WS2812B
F1 F2: library part PTC-1206
FD1 FD2 FD3 FD4 FD5: library part FIDUCIAL_1MM
IC1: library part MLP28
IC2: library part SOT89
IC3: library part ESP32MOD
IC4: library part SOP-8
L1: library part 1210
M1: library part VIBE-MOTOR-10MM
Q3 Q4 T1 T2 T3: library part SOT23-3
Q5: library part SOT323
R1 R2 R3 R4 R5 R6 R7 R8 R9 R10 R11 R12 R13 R14 R15 R16 R17 R18 R19 R20 R21 R22 R23 R24 R25 R27 R28 R29 R30 R31 R32 R35 R36 R37: library part R0603-DASHES
S1 S2: library part TACTILE-SWITCH-SMD
SJ3: library part PAD-JUMPER-2-NO_YES_SILK
T4 T5 T6: library part SOT-23
TOUCH_A TOUCH_B: library part TOUCH_BUTTON
TOUCH_SEL: library part TOUCH_CROSS
TOUCH_SELECT TOUCH_START: library part TOUCH_SELECT
TP1 TP2 TP3 TP100 TP101 TP102 TP103 TP104 TP105 TP106 TP107 TP108 TP109 TP110 TP111 TP112 TP113 TP114 TP115 TP116 TP117 TP118 TP119 TP120 TP121 TP122 TP123 TP124 TP125 TP126 TP127 TP128 TP129 TP130 TP131 TP132 TP133 TP134 TP135 TP136 TP137 TP138 TP139 TP140: library part PAD.03X.03
U1: library part QFN40P300X300X60-20N
USB1: library part MOLEX-47364-0001
X1: library part 68712414022
X2: library part MICRO-SD-SOCKET-PP
X3: library part 610X12243021
X4: library part JST-PH3

## Free pads (board coordinates)
  round 125.98 hole 125.98: 1(1118.11,3283.46) 1(1866.14,4267.72) 1(3874.02,4267.72) 1(4582.68,2692.91) 1(4582.68,3992.13)
  round 157.48 hole 157.48: 1(1157.48,4228.35) 1(4582.68,4228.35)

## Via types
v1: diameter 27.75/27.75 (per signal layer), hole 15.75, Top to Bottom, 479 vias
v2: diameter 31.69/31.69 (per signal layer), hole 19.69, Top to Bottom, 7 vias

## Nets (pads, with @x,y where several pads share a name; then routed paths per layer and width w, separated by ;. In a path a pad name is that pad's centre, name@x,y a point inside that pad or via, vN(x,y) a via of type N, cw(c..) or ccw(c..) an arc to the next point about the centre after c; other vN are vias at no path point)
3V3_SWITCHED: C7.1 C12.1 C31.1 C40.1 C41.1 R5.2 R8.2 R17.2 R25.2 R31.1 T3.3 TP116.P$1 X2.4 X3.12 | length 4245.4
  Top w12: R25.2@1929.13,3230.32 2029.53,3230.31 v1(2031.5,3228.35) C31.1@2068.9,3228.35 C31.1@2057.09,3230.31 ; C7.1@2092.52,4110.24 2092.52,4092.52 2125.98,4059.06 2125.98,4013.78 R5.2@2159.44,3980.31 R5.2@2159.45,3994.09 ; v1(2125.98,3850.39) v1@2129.92,3854.33 ; v1(2165.35,3570.87) 2177.17,3582.68 2177.17,3604.33 R17.2@2175.19,3606.3 ; v1(2598.43,3362.2) 2598.43,3338.58 2625.98,3311.02 2653.54,3311.02 2669.29,3295.28 2669.29,3047.24 2622.05,3000 X3.12@2620.08,3000
  Top w16: v1@2129.92,3854.33 2159.45,3883.86 R8.2@2159.44,3917.32 ; R5.2@2159.44,3980.31 R8.2@2159.44,3917.32 ; C12.1@2215.84,3916.71 2159.45,3916.71 R8.2@2159.44,3917.32
  Top w24: X2.4@1200.79,2931.49 1344.09,2931.5 1523.62,2751.97 1783.46,2751.97 ; R31.1@1704.72,2986.22 1726.38,2986.22 1783.46,2929.13 1783.46,2917.32 ; T3.3@1826.77,2909.45 1791.34,2909.45 1783.46,2917.32 ; C41.1@1844.49,2850.39 C40.1@1777.56,2850.39 ; X3.12@2620.08,3000 v1(2110.24,3000) 2110.24,2925.2 1937.01,2751.97 1783.46,2751.97 ; C40.1@1773.62,2850.39 C40.1@1777.56,2850.39 ; C40.1@1773.62,2850.39 1783.46,2840.55 1783.46,2751.97 ; C40.1@1773.62,2850.39 C40.1@1783.46,2860.24 ; C40.1@1777.56,2850.39 C40.1@1783.46,2860.24 ; C40.1@1783.46,2860.24 1783.46,2917.32
  Bottom w12: v1(2031.5,3228.35) 2066.93,3192.91 2118.11,3192.91 ; v1(2110.24,3000) 2118.11,3007.87 2118.11,3192.91 ; v1(2125.98,3850.39) 2133.86,3850.39 2177.17,3807.09 2177.17,3582.68 ; v1(2165.35,3570.87) 2177.17,3582.68 ; v1(2598.43,3362.2) 2610.24,3350.39 2720.47,3350.39 TP116.P$1@2751.97,3381.89 ; 2118.11,3192.91 2177.17,3251.97 2177.17,3582.68
+3V3: C17.1 C20.1 C22.1 C26.1 C27.1 C30.1 C37.1 C39.1 C43.1 C44.1 IC2.3 IC3.2 L1.1 R1.2 R16.2 R22.1 R23.1 R24.1 R28.2 R36.2 T3.2 TP119.P$1 U1.20 X1.7 X1.9 X1.10 | length 9725.3
  Top w10: 2453.75,2080.62 2453.75,1993.12 2478.75,1968.12 2547.09,1968.12 U1.20@2551.95,1963.27 ; v1(2948.82,2661.42) 2948.82,2739.44 2960,2750.62 3133.24,2750.62 R36.2@3153.54,2730.32
  Top w12: 2019.69,3177.17 2019.69,3121.87 C37.1@2020.25,3121.3 ; 2453.75,2080.62 2502.38,2129.25 ; C44.1@2583.94,2129.25 2502.38,2129.25 ; R1.2@2695,2223.41 R1.2@2703.46,2231.87 ; v1(2744.09,2665.35) v1@2746.06,2663.39 ; v1(2948.82,2661.42) 2953.75,2656.49 2953.75,2443.12 2768.14,2257.51 C43.1@2768.14,2180.99 2717.26,2231.87 R1.2@2703.46,2231.87 ; R16.2@3127.95,3618.11 3127.95,3655.51 v1(3129.92,3657.48) ; v1(3299.21,3586.61) 3299.21,3452.76 v1(3316.93,3435.04) 3314.96,3433.07 v1(3425.2,3433.07) ; v1(3870.08,3318.9) 3889.76,3318.9 3956.69,3251.97 4110.24,3251.97 4114.17,3248.03 ; 4120.08,3277.56 X1.9@4157.48,3277.56 ; X1.7@4157.48,3238.19 4124.02,3238.19 4114.17,3248.03 ; X1.10@4157.48,3297.25 4127.95,3297.24 4114.17,3283.46 4114.17,3271.65 4114.17,3248.03 ; 2502.38,2129.25 2565,2191.87 2663.46,2191.87 R1.2@2703.46,2231.87
  Top w24: C30.1@1342.52,3232.28 1342.52,3157.48 1362.2,3137.8 1578.74,3137.8 1606.3,3165.35 1606.3,3177.17 ; R22.1@1606.3,3230.32 1606.3,3177.17 ; T3.2@1789.37,2986.22 T3.2@1789.37,2992.13 ; C39.1@1937.01,2931.11 1915.35,2952.76 1830.71,2952.76 1791.34,2992.13 T3.2@1789.37,2992.13 ; v2(2153.54,3177.17) 2019.69,3177.17 1901.57,3177.17 1874.02,3204.72 1874.02,3222.44 R24.1@1866.14,3230.32 R23.1@1803.15,3230.32 1801.18,3232.28 1767.72,3232.28 1712.6,3177.17 1661.42,3177.17 ; C20.1@3478.35,3476.38 3480.32,3474.41 3480.32,3456.69 3480.32,3429.13 3492.13,3417.32 3562.99,3417.32 3588.58,3391.73 C22.1@3657.48,3391.74 3722.44,3391.73 3728.35,3397.64 3728.35,3413.39 L1.1@3724.41,3417.32 ; 1606.3,3177.17 1661.42,3177.17 ; 1661.42,3177.17 1661.42,3059.06 1671.26,3049.21 R28.2@1704.72,3049.22 1706.69,3047.24 1740.16,3047.24 1789.37,2998.03 T3.2@1789.37,2992.13
  Top w32: C30.1@1344.49,3228.35 1342.52,3232.28 1342.52,3279.53 1362.2,3299.21 C26.1@1339.33,3294.52 ; C26.1@1344.49,3303.15 C26.1@1350.39,3303.15 ; IC3.2@1349.6,3381.1 1350.39,3377.95 C26.1@1350.39,3303.15 ; C27.1@1413.39,3297.24 C26.1@1339.33,3294.52 ; IC2.3@3477.13,3622.08 3478.35,3620.87 C17.1@3478.35,3547.24 C20.1@3478.35,3476.38 ; C26.1@1339.33,3294.52 1345.7,3292.09 C26.1@1350.39,3303.15
  Top w40: v1(3425.2,3433.07) 3456.69,3433.07 C20.1@3480.32,3456.69
  Bottom w12: 2740.16,2641.73 2744.09,2645.67 v1(2744.09,2665.35) ; 2940.94,2641.73 v1@2940.94,2653.54 ; TP119.P$1@2948.82,3421.26 3303.15,3421.26 v1(3316.93,3435.04) ; v1(3129.92,3657.48) 3228.35,3657.48 v1(3299.21,3586.61)
  Bottom w16: v1(3870.08,3318.9) 3870.08,3374.02 3889.76,3393.7
  Bottom w40: v2(2153.54,3177.17) 2153.54,2720.47 2232.28,2641.73 2740.16,2641.73 2940.94,2641.73 4220.47,2641.73 4362.2,2783.46 4362.2,3354.33 4240.16,3476.38 4000,3476.38 3917.32,3393.7 3889.76,3393.7 3586.61,3393.7 3562.99,3417.32 3440.94,3417.32 v1(3425.2,3433.07)
+5V: C9.1 C11.1 D1.C D3.A F1.2 IC1.7 IC1.8 R4.2 R7.2 R30.1 T1.1 TP112.P$1 | length 2165.8
  Top w12: v1(2779.53,3984.25) v1@2787.4,3984.25 ; IC1.8@2783.46,3948.82 2783.46,3980.31 v1@2787.4,3984.25 ; IC1.7@2822.83,3988.19 2818.9,3984.25 v1@2787.4,3984.25 ; v1(3283.46,3362.2) R30.1@3305.12,3387.8
  Top w16: R7.2@2698.81,3944.88 2702.76,3948.82 C11.1@2702.75,4003.94 ; C9.1@2704.72,4055.12 C9.1@2706.69,4070.87 2702.76,4066.93 C11.1@2702.75,4003.94 ; v1(2779.53,3984.25) 2759.84,4003.94 C11.1@2702.75,4003.94
  Top w24: D1.C@3076.78,4059.06 3086.61,4066.93 F1.2@3086.62,4129.92 3086.61,4059.06 D1.C@3076.78,4059.06
  Top w32: F1.2@3086.62,4129.92 v1(3129.92,4129.92) ; F1.2@3086.61,4133.86 3090.55,4129.92 v1(3129.92,4129.92) ; R4.2@3248.03,3954.73 R4.2@3248.03,3952.76 ; v2(3311.02,4059.06) 3320.87,4049.21 T1.1@3320.87,4019.69 3320.87,3960.63 D3.A@3312.99,3952.76 R4.2@3248.03,3952.76 ; v2(3311.02,4165.35) 3212.6,4165.35 3177.17,4129.92 v1(3129.92,4129.92) ; R30.1@3313,3377.95 3314.96,3377.95 3305.12,3387.8 3259.84,3433.07 3259.84,3866.14 3248.03,3881.89 R4.2@3248.03,3952.76
  Bottom w12: v1(2779.53,3984.25) 2874.02,3984.25 2984.25,4094.49 3094.49,4094.49 v1(3129.92,4129.92) ; TP112.P$1@3204.72,3362.2 v1(3283.46,3362.2)
  Bottom w32: v2(3311.02,4059.06) v2(3311.02,4165.35)
CD0: IC3.21 TP131.P$1 | length 231.6
  Top w16: IC3.21@2020.47,3824.02 2073.62,3824.02 v1(2082.68,3814.96)
  Bottom w12: TP131.P$1@1925.2,3795.28 2062.99,3795.28 v1(2082.68,3814.96)
CHRG_STAT: IC4.7 R36.1 U1.14 | length 1575.9
  Top w10: U1.14@2643.16,1996.5 2703.75,2057.09 v1(2703.75,2089.37) ; v1(2973.75,2346.87) 2995,2346.87 3205,2556.87 3205,2776.87 3183.75,2798.12 3154.42,2798.12 R36.1@3153.54,2797.24 3153.54,2838.58 3181.1,2866.14 3185.04,2866.14 3204.72,2885.83 3204.72,2933.07 v1(3232.28,2960.63) ; v1(3433.07,2901.57) 3433.07,2942.13 IC4.7@3434.45,2943.5
  Bottom w10: v1(2703.75,2089.37) 2716.25,2089.37 v1(2973.75,2346.87) ; v1(3232.28,2960.63) 3244.09,2960.63 3322.83,2881.89 3413.39,2881.89 v1(3433.07,2901.57)
CLK: IC3.20 TP130.P$1 | length 189.1
  Top w16: IC3.20@2020.47,3774.02 2081.1,3774.02 v1(2082.68,3775.59)
  Bottom w12: TP130.P$1@1964.57,3755.91 2062.99,3755.91 v1(2082.68,3775.59)
CND: IC3.19 TP128.P$1 | length 232.9
  Top w16: IC3.19@2020.47,3724.02 2070.47,3724.02 v1(2082.68,3736.22)
  Bottom w12: TP128.P$1@1925.2,3716.54 2062.99,3716.54 v1(2082.68,3736.22)
ESP32_!RESET: IC3.3 Q3.3 R22.2 S1.3 TP121.P$1 | length 2356.3
  Top w12: IC3.3@1401.57,3383.07 IC3.3@1399.6,3381.1 1399.61,3431.1 v1(1401.57,3433.07) 1527.56,3433.07 1625.98,3531.5 1779.53,3531.5 1799.21,3551.18 1858.27,3551.18 1866.14,3559.06 v1(1901.57,3559.06) ; R22.2@1606.3,3297.24 v1(1606.3,3330.71) ; v1(2102.36,3543.31) 2185.04,3543.31 2192.91,3535.43 2574.8,3535.43 2610.24,3500 2664.92,3500 S1.3@2665.12,3500.2 2665.12,3523.39 v1(2675.2,3533.46) ; Q3.3@2811.02,3728.35 2807.09,3732.28 2755.91,3732.28 2720.47,3767.72 2688.98,3767.72 2673.23,3751.97 2673.23,3728.35 2704.72,3696.85 2704.72,3562.99 2688.98,3547.24 ; v1(2675.2,3533.46) 2688.98,3547.24 ; v1(2675.2,3533.46) 2688.98,3547.24
  Bottom w12: v1(1401.57,3433.07) 1401.57,3358.27 1429.13,3330.71 v1(1606.3,3330.71) ; v1(1901.57,3559.06) 1925.2,3535.43 2094.49,3535.43 v1(2102.36,3543.31) ; v1(2675.2,3533.46) 2675.2,3537.4 TP121.P$1@2791.34,3421.26
ESP32_FLASH: D2.C IC3.25 Q4.3 R16.1 S2.3 TP120.P$1 | length 1963.9
  Top w10: v1(1948.82,4078.74) 1948.82,4110.24 IC3.25@1952.76,4114.17
  Top w12: IC3.25@1949.6,4117.32 IC3.25@1952.76,4114.17 ; D2.C@2171.26,4043.31 2220.47,4084.65 v1(2220.47,4102.36) ; v1(2700.79,3740.16) 2724.41,3716.54 2724.41,3566.93 2744.09,3547.24 2909.45,3547.24 2917.32,3555.12 Q4.3@2960.63,3555.12 2988.19,3555.12 3023.62,3590.55 3051.18,3590.55 3062.99,3602.36 3062.99,3627.95 R16.1@3061.03,3618.11 ; v1(2870.08,3500) S2.3@2984.02,3500.2
  Top w16: Q4.3@2960.63,3555.12 2960.63,3515.75 2976.18,3500.2 S2.3@2984.02,3500.2
  Bottom w10: v1(1948.82,4078.74) 1964.57,4090.55 2188.98,4090.55
  Bottom w12: v1(2220.47,4102.36) 2220.47,4090.55 2240.16,4090.55 2393.7,3937.01 2393.7,3767.72 2433.07,3728.35 2688.98,3728.35 v1(2700.79,3740.16) ; TP120.P$1@2870.08,3421.26 v1(2870.08,3500)
ESP32_RX: D4.C IC1.26 IC3.34 TP133.P$1 | length 2228.1
  Top w10: IC1.26@2980.32,3909.45 3019.69,3909.45 v1(3031.5,3921.26)
  Top w12: IC3.34@1499.6,4117.32 1500,4116.93 v1(1500,4047.24) ; IC1.26@2980.32,3909.45 3019.69,3909.45 v1(3031.5,3921.26) 3035.43,3929.13 D4.C@3083.58,3929.13
  Bottom w12: v1(1500,4047.24) 1515.75,4031.5 1657.48,4031.5 1665.35,4039.37 1783.46,4039.37 1826.77,4082.68 1830.71,4086.61 1889.76,4086.61 1905.51,4070.87 1917.32,4070.87 1937.01,4051.18 1960.63,4051.18 1980.32,4070.87 1996.06,4070.87 2232.28,4070.87 2374.02,3929.13 2374.02,3759.84 2425.2,3708.66 2751.97,3708.66 2850.39,3708.66 3007.87,3862.2 3007.87,3897.64 v1(3031.5,3921.26)
  Bottom w16: v1(1500,4047.24) 1511.81,4059.06 TP133.P$1@1511.81,4090.55
ESP32_TX: D5.C IC1.25 IC3.35 TP134.P$1 | length 2296.5
  Top w10: IC1.25@2980.32,3889.76 3019.69,3889.76
  Top w12: v1(1448.82,4027.56) 1448.82,4116.54 IC3.35@1449.6,4117.32 ; IC1.25@2980.32,3889.76 3019.69,3889.76 ; D5.C@3083.58,3870.08 3047.24,3870.08 v1(3035.43,3877.95) ; 3019.69,3889.76 v1(3035.43,3877.95) ; 3019.69,3889.76 v1(3035.43,3877.95)
  Bottom w12: v1(1448.82,4027.56) 1464.57,4011.81 1665.35,4011.81 1673.23,4019.69 1791.34,4019.69 1838.58,4066.93 1881.89,4066.93 1897.64,4051.18 1909.45,4051.18 1929.13,4031.5 1968.5,4031.5 1988.19,4051.18 1992.13,4051.18 2220.47,4051.18 2354.33,3917.32 2354.33,3751.97 2417.32,3688.98 2759.84,3688.98 2862.2,3688.98 3035.43,3862.2 v1(3035.43,3877.95)
  Bottom w16: v1(1448.82,4027.56) 1452.76,4031.5 TP134.P$1@1452.76,4090.55
EXTIO-0: IC3.9 X3.3 | length 1450.9
  Top w12: IC3.9@1696.85,3383.86 IC3.9@1699.6,3381.1 1699.61,3447.64 1720.47,3468.5 1822.83,3468.5 v1(1830.71,3476.38) ; v1(2149.61,3476.38) 2346.46,3476.38 v1(2374.02,3448.82) ; v1(2771.65,3303.15) 2779.53,3311.02 2803.15,3311.02 2820.08,3294.09 X3.3@2820.08,3251.96
  Bottom w12: v1(1830.71,3476.38) v1(2149.61,3476.38) ; v1(2374.02,3448.82) 2354.33,3429.13 2354.33,3307.09 2374.02,3287.4 2755.91,3287.4 v1(2771.65,3303.15)
EXTIO-1: IC3.27 X3.4 | length 1848.4
  Top w12: IC3.27@1849.6,4117.32 1849.61,4059.84 v1(1870.08,4039.37) ; v1(2874.02,3279.53) 2892.52,3279.53 X3.4@2920.08,3251.96
  Bottom w12: v1(1870.08,4039.37) 1877.95,4031.5 1901.57,4031.5 1921.26,4011.81 1976.38,4011.81 1996.06,4031.5 2208.66,4031.5 2334.65,3905.51 2334.65,3901.57 2334.65,3295.28 2334.65,3291.34 2358.27,3267.72 2862.2,3267.72 v1(2874.02,3279.53)
EXTIO-2: IC3.28 X3.5 | length 2003.8
  Top w12: IC3.28@1799.6,4117.32 1799.61,4050.79 v1(1830.71,4019.69) ; v1(2972.44,3263.78) 3008.27,3263.78 X3.5@3020.08,3251.96
  Bottom w12: v1(1830.71,4019.69) 1834.65,4019.69 1846.46,4011.81 1893.7,4011.81 1913.39,3992.13 1984.25,3992.13 2003.94,4011.81 2196.85,4011.81 2314.96,3893.7 2314.96,3295.28 2314.96,3283.46 2350.39,3248.03 2956.69,3248.03 v1(2972.44,3263.78)
EXTIO-3: IC3.26 X3.9 | length 2290.4
  Top w12: IC3.26@1899.6,4117.32 1899.61,4176.48 1906.25,4183.12 2221.25,4183.12 2450,3954.37 2450,3919.37 v1(2486.25,3883.12) ; v1(2470,3574.37) 2470,3709.37 2487.5,3726.87 v1(2487.5,3803.12) ; v1(2511.25,3379.37) 2511.25,3048.12 v1(2515,3044.37) ; v1(2513.75,2949.37) 2567.5,2895.62 2592.5,2895.62 2642.5,2945.62 2710,2945.62 2746.25,2909.37 2885,2909.37 2922.5,2946.87 2922.5,2997.58 X3.9@2920.08,3000
  Bottom w12: v1(2470,3574.37) 2470,3420.62 v1(2511.25,3379.37) ; v1(2486.25,3883.12) 2486.25,3804.37 v1(2487.5,3803.12) ; v1(2513.75,2949.37) 2515,2950.62 v1(2515,3044.37)
EXTIO-4: IC3.14 X3.10 | length 1473.7
  Top w12: IC3.14@1949.6,3381.1 2003.75,3326.96 v1(2003.75,3315.62) ; v1(1993.75,2985.62) 2033.75,2985.62 2133.75,3085.62 v1(2405,3085.62) ; v1(2771.25,3125.62) 2767.5,3121.87 2767.5,3036.87 2804.37,3000 X3.10@2820.08,3000
  Bottom w12: v1(1993.75,2985.62) 1923.75,3055.62 1923.75,3235.62 v1(2003.75,3315.62) ; v1(2405,3085.62) 2445,3125.62 v1(2771.25,3125.62)
GDR: Q5.1 TP124.P$1 X1.23 | length 382.1
  Top w12: Q5.1@3836.61,3595.48 3838.58,3594.49 v1@4007.87,3594.49 ; X1.23@4157.48,3553.15 4112.2,3553.15 4110.24,3555.12 4066.93,3594.49 v1(4019.69,3594.49) ; v1@4007.87,3594.49 v1(4019.69,3594.49) ; v1@4007.87,3594.49 v1(4019.69,3594.49)
  Bottom w12: v1(4019.69,3594.49) 4047.24,3594.49 TP124.P$1@4051.18,3598.43